# EAGLE board InkTime_v5_PCB (EAGLE 9.7.0)
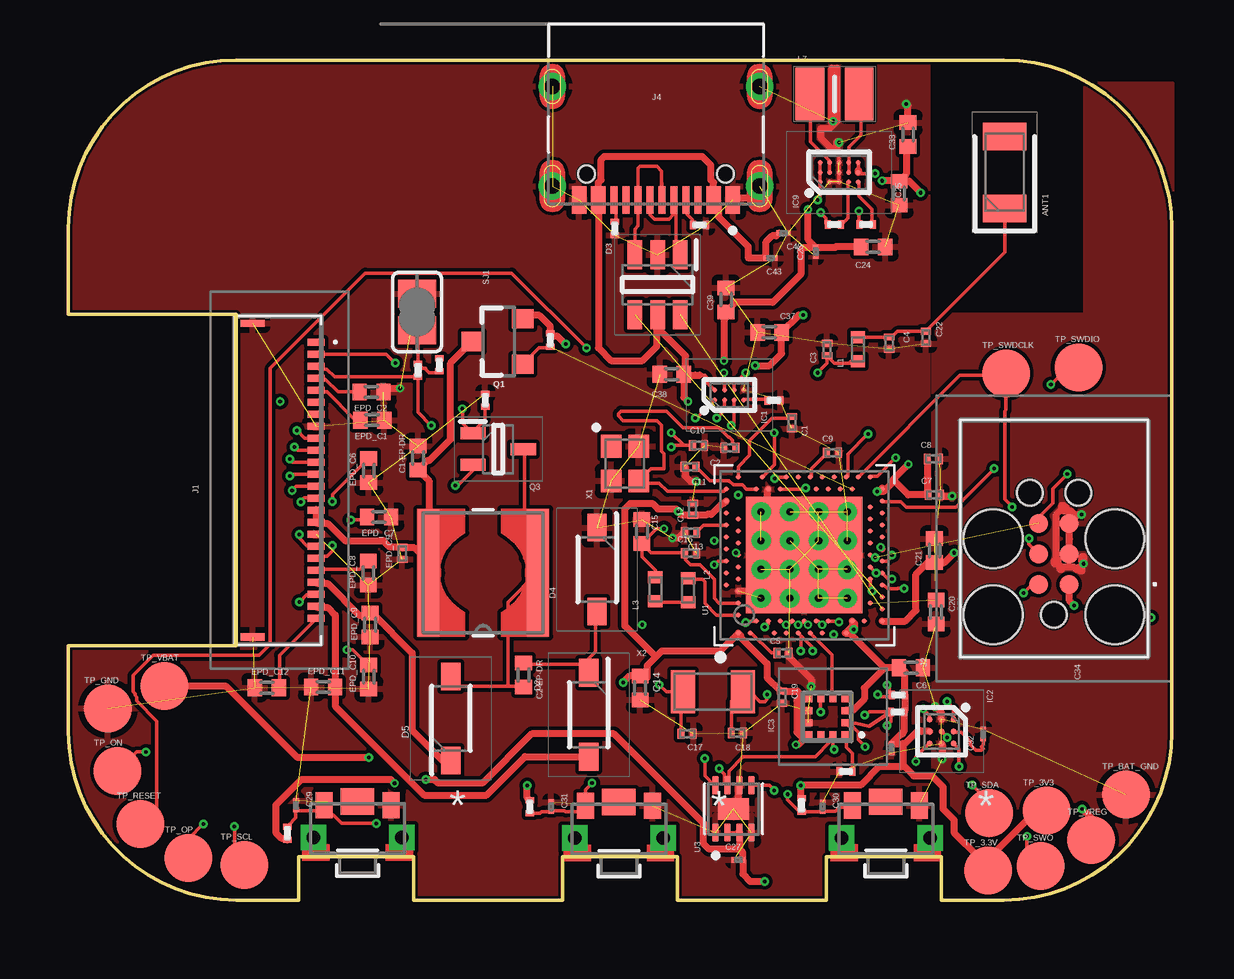
[diagram p0: board, top side]
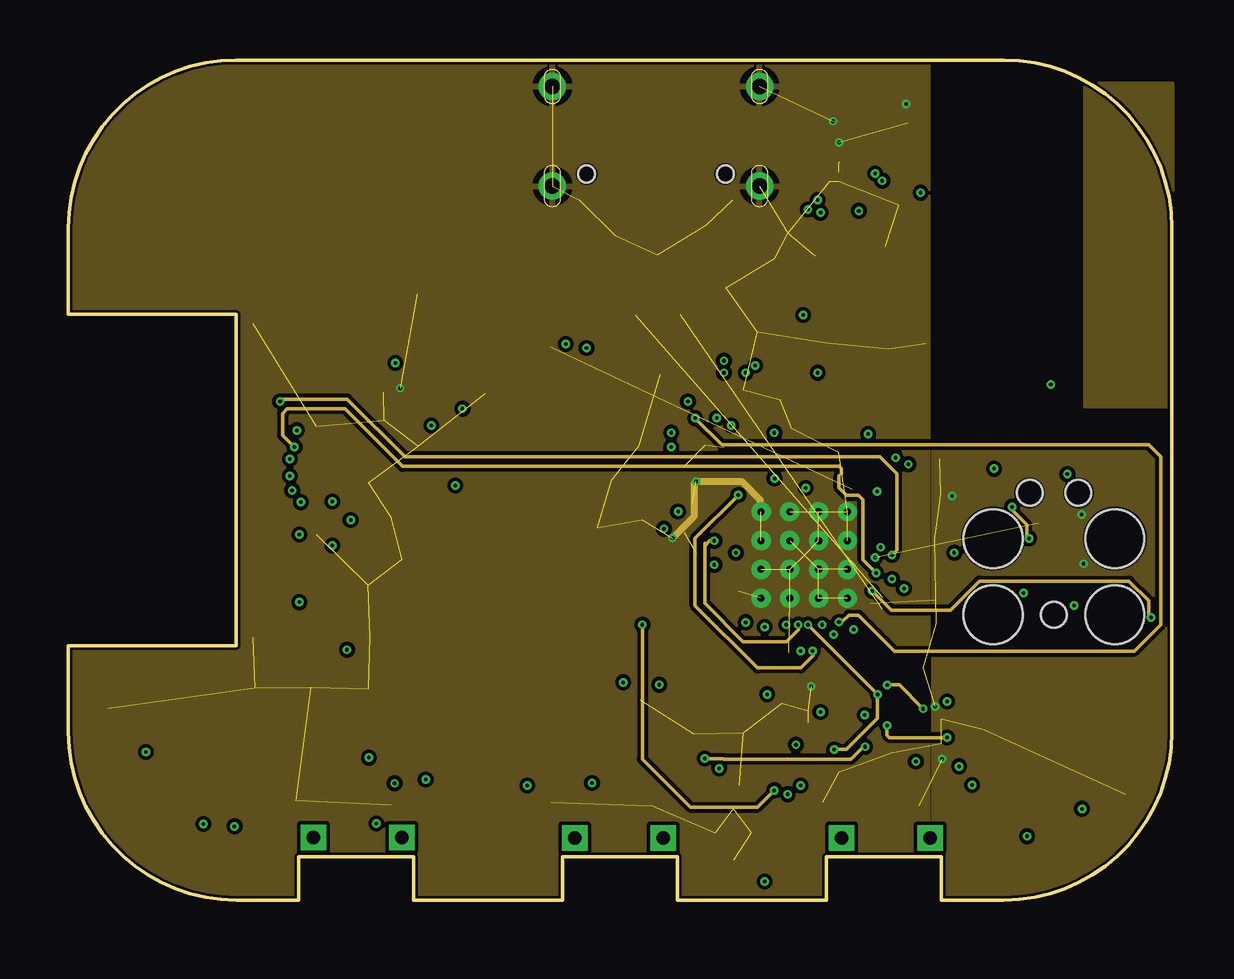
[diagram p1: board, inner layer Route2]
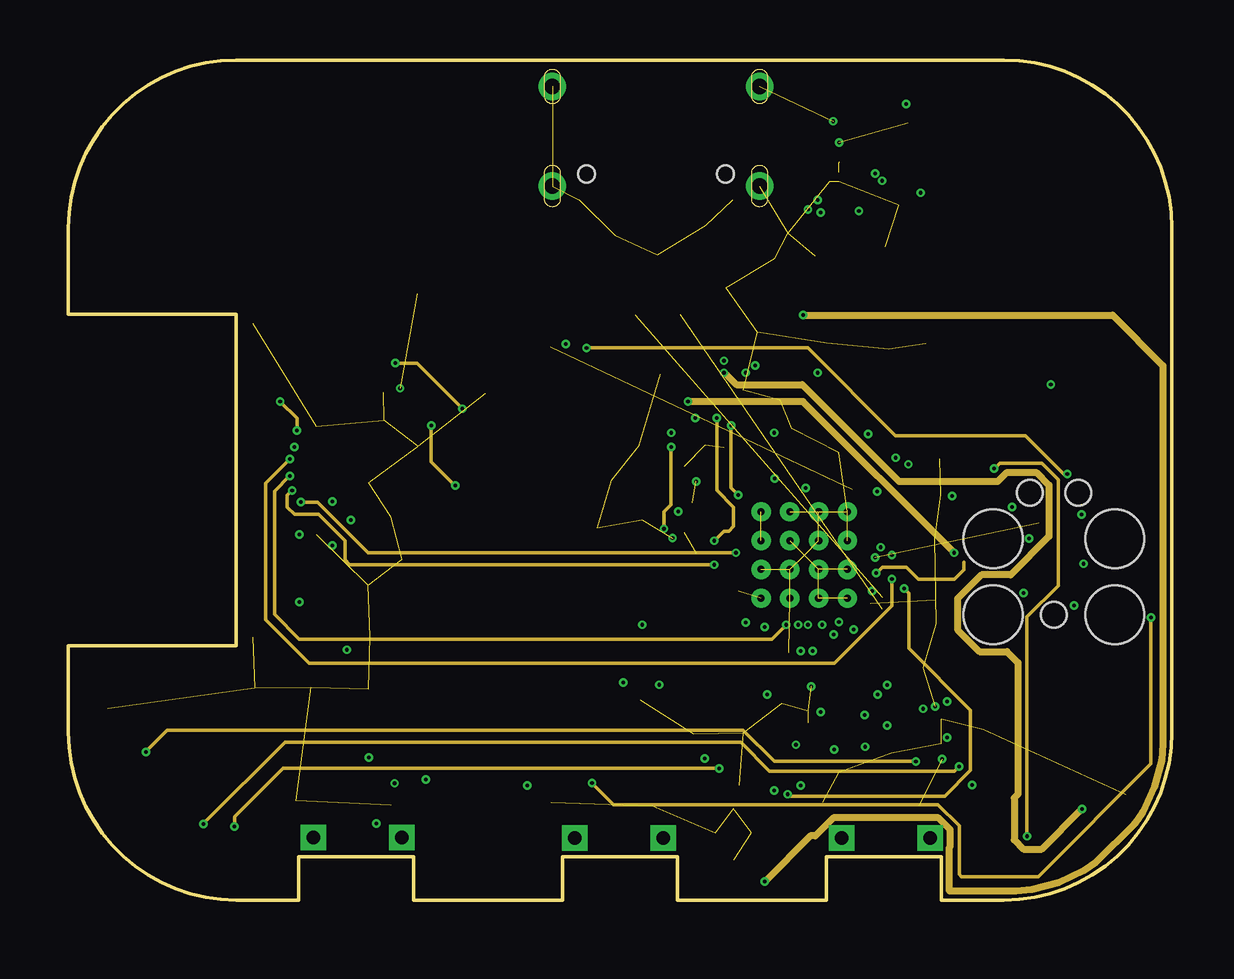
[diagram p2: board, inner layer Route15]
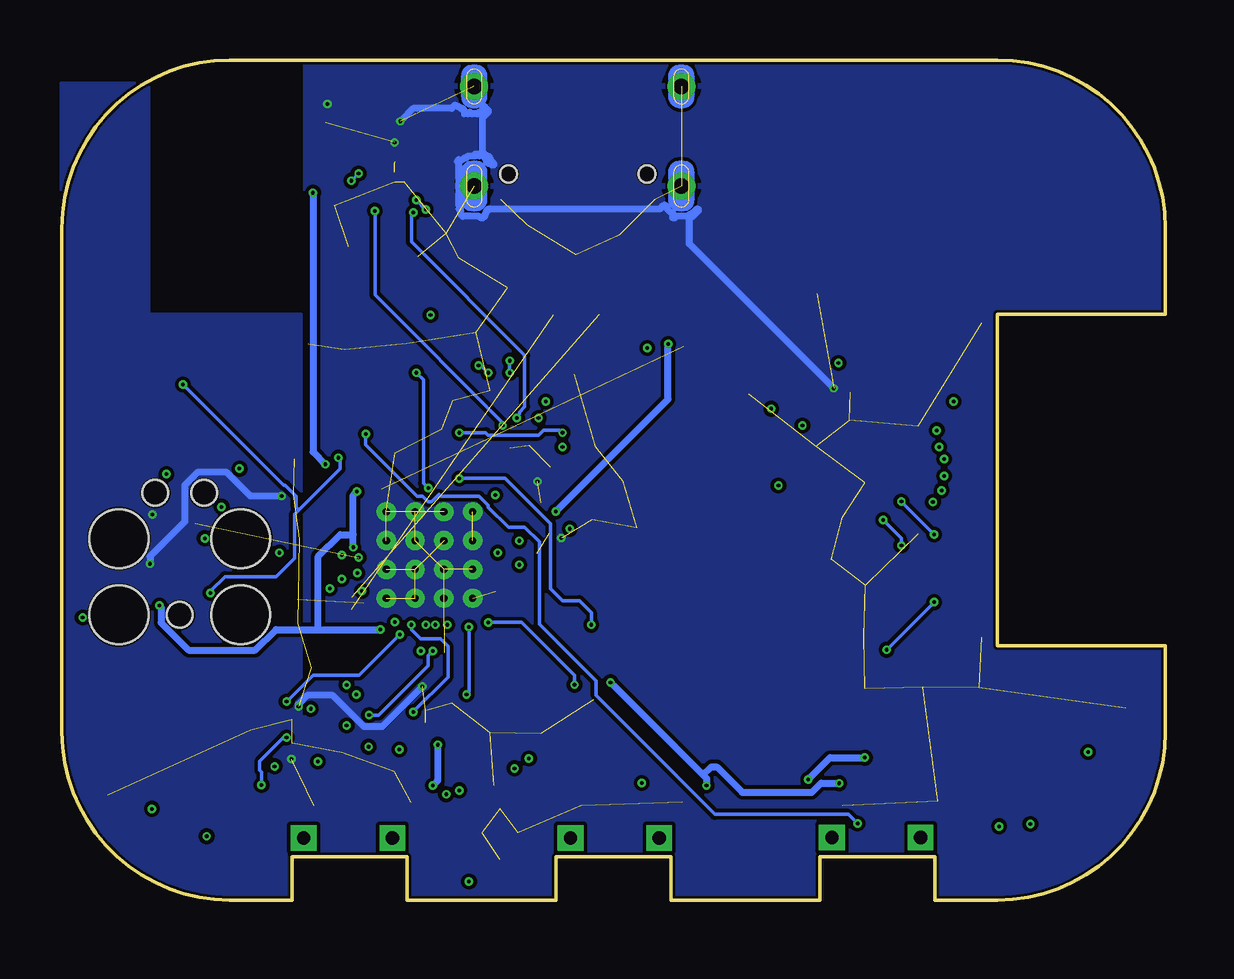
[diagram p3: board, bottom side, seen from below]

Size 46 x 35 mm. Coordinates in mm from the lower left corner, seen from the top.
Outline: 39,0 36.4,0 36.4,1.8 31.6,1.8 31.6,0 25.4,0 25.4,1.8 20.6,1.8 20.6,0 14.4,0 14.4,1.8 9.6,1.8 9.6,0 7,0 arc-90 0,7 0,10.6 7,10.6 7,24.4 0,24.4 0,28 arc-90 7,35 39,35 arc-90 46,28 46,7 arc-90 39,0
Copper layers (1+2*15+16): Top 0.035mm / dielectric 1.5mm / Route2 0.035mm / dielectric 0.15mm / Route15 0.035mm / dielectric 0.2mm / Bottom 0.035mm
Design rules "Fusion Electronics Design Rules *": minimum track width 6mil, minimum drill 0.15mm, track to track 6mil, track to pad 6mil, pad to pad 6mil, via to via 6mil, smd to smd 6mil, copper to edge 0.1mm, drill to drill 6mil, minimum pad ring 10mil, minimum via ring 0.1mm, stop-mask expansion 4mil, vias tented up to drill 9999mil, thermal gap 10mil
Net classes: 1 Power: width 0.3 mm

## Footprints (pad centres in the part's own frame; a part is rotated, then mirrored left to right if it is on the bottom)
2450AT18B100E_ANTC3216X140N = smd 1.15 x 1.8: 1 -1.5,0; 2 1.5,0
NORDIC_NRF_3_RESC0201_L = smd 0.28 x 0.43: 1 -0.255,0; 2 0.255,0
PERFECT_0402_0402 = smd 0.6 x 0.7: 1 -0.5,0; 2 0.5,0
GRM011R60J152KE01L_2_CAPC0201X13N = smd 0.22 x 0.23: 1 -0.185,0; 2 0.185,0
ESP32_C6_LIBRARY_5_SOD3716X135N = smd 1.15 x 0.8: 1 -1.75,0; 2 1.75,0
ESP32_C6_LIBRARY_3_SOT95P280X145-6N = smd 1.2 x 0.6: 1 -1.25,0.95; 2 -1.25,0; 3 -1.25,-0.95; 4 1.25,-0.95; 5 1.25,0; 6 1.25,0.95
BQ25180YBGR_BGA8C40P2X4_100X155X50 = smd 0.2 x 0.2: A1 -0.2,0.6; A2 0.2,0.6; B1 -0.2,0.2; B2 0.2,0.2; C1 -0.2,-0.2; C2 0.2,-0.2; D1 -0.2,-0.6; D2 0.2,-0.6
DRV2605YZFR_BGA9C50P3X3_144X144X62 = smd 0.25 x 0.25: A1 -0.5,0.5; A2 0,0.5; A3 0.5,0.5; B1 -0.5,0; B2 0,0; B3 0.5,0; C1 -0.5,-0.5; C2 0,-0.5; C3 0.5,-0.5
BMA423_BMA423 = smd 0.3 x 0.35: 1 -0.75,-0.775; 2 -0.25,-0.775; 3 0.25,-0.775; 4 0.75,-0.775; 7 0.75,0.775; 8 0.25,0.775; 9 -0.25,0.775; 10 -0.75,0.775 | smd 0.35 x 0.3: 5 0.775,-0.25; 6 0.775,0.25; 11 -0.775,0.25; 12 -0.775,-0.25
RT6160AWSC_BGA15C40P3X5_140X230X60 = smd 0.216 x 0.216: A1 -0.4,0.8; A2 0,0.8; A3 0.4,0.8; B1 -0.4,0.4; B2 0,0.4; B3 0.4,0.4; C1 -0.4,0; C2 0,0; C3 0.4,0; D1 -0.4,-0.4; D2 0,-0.4; D3 0.4,-0.4; E1 -0.4,-0.8; E2 0,-0.8; E3 0.4,-0.8
503480-2400_5034802400 = smd 0.3 x 0.7: 1 -5.75,1.525; 2 -5.25,1.525; 3 -4.75,1.525; 4 -4.25,1.525; 5 -3.75,1.525; 6 -3.25,1.525; 7 -2.75,1.525; 8 -2.25,1.525; 9 -1.75,1.525; 10 -1.25,1.525; 11 -0.75,1.525; 12 -0.25,1.525; 13 0.25,1.525; 14 0.75,1.525; 15 1.25,1.525; 16 1.75,1.525; 17 2.25,1.525; 18 2.75,1.525; 19 3.25,1.525; 20 3.75,1.525; 21 4.25,1.525; 22 4.75,1.525; 23 5.25,1.525; 24 5.75,1.525 | smd 0.3 x 1: MP1 -6.54,-1.125; MP2 6.54,-1.125
TC2030-IDC_TC2030IDC = smd 0.783 x 0.783: 1 -0.953,-0.635; 2 -0.953,0.635; 3 0.317,-0.635; 4 0.317,0.635; 5 1.588,-0.635; 6 1.588,0.635 | hole 2.451: -2.223,-2.54; -2.223,2.54; 0.952,-2.54; 0.952,2.54 | hole 1.067: -2.223,0; 2.857,-1.016; 2.857,1.016
KH-TYPE-C-16P_KINGHELM_KH-TYPE-C-16P = smd 0.6 x 1.15: A1_B12 -3.2,4.725; A4_B9 -2.4,4.725; A9_B4 2.4,4.725; A12_B1 3.2,4.725 | smd 0.3 x 1.15: A5 -1.25,4.725; A6 -0.25,4.725; A7 0.25,4.725; A8 1.25,4.725; B5 1.75,4.725; B6 0.75,4.725; B7 -0.75,4.725; B8 -1.75,4.725 | drill 0.65 pad 1.05: SH1 -4.32,0; SH2 4.32,0; SH3 -4.32,4.15; SH4 4.32,4.15 | hole 0.7: -2.89,3.65; 2.89,3.65
NORDIC_NRF_2_RESC0402_L = smd 0.5 x 0.6: 1 -0.5,0; 2 0.5,0
ESP32_C6_LIBRARY_2_IND_4828-WE-TPC_WRE = smd 0.9 x 5.3: 1 -2.286,0; 2 2.286,0
MLP2016SR47MT0S1_INDC2016X100N = smd 1.2 x 2.2: 1 -1.028,0; 2 1.028,0
ERA-1AEB3401C_0201 = smd 0.35 x 0.25: 1 0,0.275; 2 0,-0.275
ESP32_C6_LIBRARY_4_ESP32_C6_LIBRARY_4_ESP32_C6_LIBRARY_4_ESP32_C6_LIBRARY_4_ESP32_WROVER_SPARKFUN-DISCRETESEMI_SOT23-3 = smd 0.8 x 0.9: 1 -0.95,-1; 2 0.95,-1; 3 0,1.1
ESP32_C6_LIBRARY_6_SOT65P210X110-3N = smd 1.05 x 0.5: 1 -1.05,0.65; 2 -1.05,-0.65; 3 1.05,0
CPF0201D7K68C1_0201 = smd 0.35 x 0.25: 1 0,0.275; 2 0,-0.275
ESP32_C6_LIBRARY_7_JUMPER_SJ = smd 1.168 x 1.6: 1 -0.762,0; 2 0.762,0
2025-10-22_07-23-44_LIBRARY_SW_EVP-AKE31A_PAN = smd 0.711 x 1.092: 1 -1.4,-0.972; 2 1.4,-0.972 | drill 0.559 pad 0.914 square: 3 -1.848,0.381; 4 1.848,0.381 | smd 1.397 x 1.092: 5 0,-1.124
HECTOR_WATCH_1_TP20R = smd 2 x 2: TP 0,0
NORDIC_NRF_4_AQFN50P700X700X85_HS-74N = smd 4.85 x 4.85: P$74 0,0 | drill 0.3 pad 0.6: P$75 -1.8,1.8; P$76 -0.6,1.8; P$77 0.6,1.8; P$78 1.8,1.8; P$79 -1.8,0.6; P$80 -0.6,0.6; P$81 0.6,0.6; P$82 1.8,0.6; P$83 -1.8,-0.6; P$84 -0.6,-0.6; P$85 0.6,-0.6; P$86 1.8,-0.6; P$87 -1.8,-1.8; P$88 -0.6,-1.8; P$89 0.6,-1.8; P$90 1.8,-1.8 | smd 0.2 x 0.2: P$A8 -1.25,3.25; P$A10 -0.75,3.25; P$A12 -0.25,3.25; P$A14 0.25,3.25; P$A16 0.75,3.25; P$A18 1.25,3.25; P$A20 1.75,3.25; P$A22 2.25,3.25; P$A23 2.75,3.25; P$AA24 3.25,-2.25; P$AB2 -2.75,-2.5; P$AC5 -2,-2.75; P$AC9 -1,-2.75; P$AC11 -0.5,-2.75; P$AC13 0,-2.75; P$AC15 0.5,-2.75; P$AC17 1,-2.75; P$AC19 1.5,-2.75; P$AC21 2,-2.75; P$AC24 3.25,-2.75; P$AD2 -2.75,-3.25; P$AD4 -2.25,-3.25; P$AD6 -1.75,-3.25; P$AD8 -1.25,-3.25; P$AD10 -0.75,-3.25; P$AD12 -0.25,-3.25; P$AD14 0.25,-3.25; P$AD16 0.75,-3.25; P$AD18 1.25,-3.25; P$AD20 1.75,-3.25; P$AD22 2.25,-3.25; P$AD23 2.75,-3.25; P$B1 -3.25,2.75; P$B3 -2.5,2.75; P$B5 -2,2.75; P$B7 -1.5,2.75; P$B9 -1,2.75; P$B11 -0.5,2.75; P$B13 0,2.75; P$B15 0.5,2.75; P$B17 1,2.75; P$B19 1.5,2.75; P$B24 3.25,2.75; P$C1 -3.25,2.25; P$D2 -2.75,2; P$D23 2.75,2; P$E24 3.25,1.75; P$F2 -2.75,1.5; P$F23 2.75,1.5; P$G1 -3.25,1.25; P$H2 -2.75,1; P$H23 2.75,1; P$J1 -3.25,0.75; P$J24 3.25,0.75; P$K2 -2.75,0.5; P$L1 -3.25,0.25; P$L24 3.25,0.25; P$M2 -2.75,0; P$N1 -3.25,-0.25; P$N24 3.25,-0.25; P$P2 -2.75,-0.5; P$P23 2.75,-0.5; P$R1 -3.25,-0.75; P$R24 3.25,-0.75; P$T2 -2.75,-1; P$T23 2.75,-1; P$U1 -3.25,-1.25; P$U24 3.25,-1.25; P$V23 2.75,-1.5; P$W1 -3.25,-1.75; P$W24 3.25,-1.75; P$Y2 -2.75,-2; P$Y23 2.75,-2
ESP32_C6_LIBRARY_SON50P200X200X80-9N = smd 0.76 x 0.27: 1 -0.985,0.75; 2 -0.985,0.25; 3 -0.985,-0.25; 4 -0.985,-0.75; 5 0.985,-0.75; 6 0.985,-0.25; 7 0.985,0.25; 8 0.985,0.75 | smd 0.9 x 1.3: 9 0,0
NORDIC_NRF_BT-XTAL_2016_N = smd 0.95 x 0.85: 1 -0.725,-0.575; 2 0.725,-0.575; 3 0.725,0.575; 4 -0.725,0.575
NORDIC_NRF_1_XTAL_3215_N = smd 1 x 1.8: 1 -1.25,0; 2 1.25,0

## Placement (x,y rotation side)
ANT1  2450AT18B100E  [2450AT18B100E_ANTC3216X140N]  39.03,30.32 90 top
C1  12pF  [NORDIC_NRF_3_RESC0201_L]  30.16,19.89 270 top
C1-EP-DR  10uF  [PERFECT_0402_0402]  14.57,18.41 90 top
C2  12pF  [NORDIC_NRF_3_RESC0201_L]  27.57,18.84 180 top
C2-EP-DR  4.7uF/25V  [PERFECT_0402_0402]  18.98,9.38 270 top
C3  1pF  [NORDIC_NRF_3_RESC0201_L]  31.62,22.94 90 top
C4  1pF  [NORDIC_NRF_3_RESC0201_L]  34.21,23.2 270 top
C5  100nF  [NORDIC_NRF_3_RESC0201_L]  29.79,10.3 0 top
C6  4.7µF  [PERFECT_0402_0402]  35.12,9.68 0 top
C7  100nF  [NORDIC_NRF_3_RESC0201_L]  36.09,16.88 0 top
C8  100nF  [NORDIC_NRF_3_RESC0201_L]  36.05,18.38 0 top
C9  N.C.  [NORDIC_NRF_3_RESC0201_L]  31.86,18.63 0 top
C10  N.C.  [NORDIC_NRF_3_RESC0201_L]  26.27,18.94 0 top
C11  100pF  [NORDIC_NRF_3_RESC0201_L]  25.91,18.05 180 top
C12  100nF  [NORDIC_NRF_3_RESC0201_L]  26.02,16.29 90 top
C13  N.C.  [NORDIC_NRF_3_RESC0201_L]  25.93,15.31 180 top
C14  4.7µF  [PERFECT_0402_0402]  23.84,8.84 270 top
C15  1.0µF  [PERFECT_0402_0402]  23.91,15.35 90 top
C16  47nF  [NORDIC_NRF_3_RESC0201_L]  25.93,14.45 0 top
C17  12pF  [NORDIC_NRF_3_RESC0201_L]  25.8,6.93 180 top
C18  12pF  [NORDIC_NRF_3_RESC0201_L]  27.89,6.96 180 top
C19  100nF  [NORDIC_NRF_3_RESC0201_L]  29.75,8.45 270 top
C20  4.7µF  [PERFECT_0402_0402]  36.17,12 270 top
C21  4.7µF  [PERFECT_0402_0402]  36.1,14.55 90 top
C22  N.C.  [NORDIC_NRF_3_RESC0201_L]  35.75,23.44 270 top
C23  0.1uF  [GRM011R60J152KE01L_2_CAPC0201X13N]  31.15,27.01 90 top
C24  10uF  [PERFECT_0402_0402]  33.55,27.21 180 top
C25  22uF  [PERFECT_0402_0402]  34.63,29.45 270 top
C27  0.1uF  [GRM011R60J152KE01L_2_CAPC0201X13N]  27.93,1.67 0 top
C29  1uF  [GRM011R60J152KE01L_2_CAPC0201X13N]  9.49,3.95 270 top
C30  1uF  [GRM011R60J152KE01L_2_CAPC0201X13N]  31.44,3.89 270 top
C31  1uF  [GRM011R60J152KE01L_2_CAPC0201X13N]  20.13,3.89 270 top
C32  1uF  [GRM011R60J152KE01L_2_CAPC0201X13N]  38.14,6.91 270 top
C33  22uF  [PERFECT_0402_0402]  35,31.89 90 top
C34  0.1uF  [GRM011R60J152KE01L_2_CAPC0201X13N]  34.31,6.33 90 top
C37  1µF  [PERFECT_0402_0402]  29.23,23.65 180 top
C38  1µF  [PERFECT_0402_0402]  25.16,21.91 180 top
C39  10µF  [PERFECT_0402_0402]  27.41,25 90 top
C42  0.1uF  [GRM011R60J152KE01L_2_CAPC0201X13N]  29.8,27.78 180 top
C43  0.1uF  [GRM011R60J152KE01L_2_CAPC0201X13N]  29.27,26.75 180 top
D2  MBR0530  [ESP32_C6_LIBRARY_5_SOD3716X135N]  21.69,7.72 270 top
D3  USBLC6-2SC6Y  [ESP32_C6_LIBRARY_3_SOT95P280X145-6N]  24.56,25.64 270 top
D4  MBR0530  [ESP32_C6_LIBRARY_5_SOD3716X135N]  22.04,13.77 270 top
D5  MBR0530  [ESP32_C6_LIBRARY_5_SOD3716X135N]  15.95,7.56 90 top
EPD_C1  1uF/50V  [PERFECT_0402_0402]  12.66,19.99 180 top
EPD_C2  1uF/50V  [PERFECT_0402_0402]  12.64,21.16 180 top
EPD_C5  0.1uF/50V  [NORDIC_NRF_3_RESC0201_L]  13.92,14.44 90 top
EPD_C6  1uF/50V  [PERFECT_0402_0402]  12.52,17.89 90 top
EPD_C7  1uF/50V  [PERFECT_0402_0402]  12.95,15.95 180 top
EPD_C8  1uF/50V  [PERFECT_0402_0402]  12.5,13.62 90 top
EPD_C9  1uF/50V  [PERFECT_0402_0402]  12.57,11.46 90 top
EPD_C10  1uF/50V  [PERFECT_0402_0402]  12.52,9.3 90 top
EPD_C11  1uF/50V  [PERFECT_0402_0402]  10.62,8.88 0 top
EPD_C12  1uF/50V  [PERFECT_0402_0402]  8.27,8.85 0 top
IC1  BQ25180YBGR  [BQ25180YBGR_BGA8C40P2X4_100X155X50]  27.55,21.04 90 top
IC2  DRV2605YZFR  [DRV2605YZFR_BGA9C50P3X3_144X144X62]  36.4,7.03 270 top
IC3  BMA423  [BMA423_BMA423]  31.62,7.63 90 top
IC9  RT6160AWSC  [RT6160AWSC_BGA15C40P3X5_140X230X60]  32.13,30.32 90 top
J1  503480-2400  [503480-2400_5034802400]  8.8,17.49 270 top
J2  TC2030-IDC_TC2030-IDC  [TC2030-IDC_TC2030IDC]  41.08,14.1 90 top
J4  KH-TYPE-C-16P  [KH-TYPE-C-16P_KINGHELM_KH-TYPE-C-16P]  24.49,33.9 180 top
L1  3.9nH  [NORDIC_NRF_2_RESC0402_L]  32.91,22.95 90 top
L2  10µH  [NORDIC_NRF_2_RESC0402_L]  25.84,12.91 270 top
L3  15nH  [NORDIC_NRF_2_RESC0402_L]  24.47,12.95 90 top
L5  68uH  [ESP32_C6_LIBRARY_2_IND_4828-WE-TPC_WRE]  17.29,13.63 180 top
L7  FTC252012SR47MBCA  [MLP2016SR47MT0S1_INDC2016X100N]  31.94,33.58 0 top
P_PWR_EPD  10K  [ERA-1AEB3401C_0201]  20.09,23.33 180 top
Q1  20V/4.2A/52mΩ/1.4W  [ESP32_C6_LIBRARY_4_ESP32_C6_LIBRARY_4_ESP32_C6_LIBRARY_4_ESP32_C6_LIBRARY_4_ESP32_WROVER_SPARKFUN-DISCRETESEMI_SOT23-3]  17.94,23.27 90 top
Q3  SI1308EDL-T1-GE3  [ESP32_C6_LIBRARY_6_SOT65P210X110-3N]  17.91,18.79 0 top
R1_EP_DR  0.47  [CPF0201D7K68C1_0201]  14.57,22.08 0 top
R1_USB  5K1  [ERA-1AEB3401C_0201]  26.31,28.12 270 top
R2  0  [ERA-1AEB3401C_0201]  33.25,28.15 90 top
R2_EP_DR  10k  [CPF0201D7K68C1_0201]  17.38,20.83 0 top
R2_USB  5K1  [ERA-1AEB3401C_0201]  22.78,27.98 0 top
R3  0\  [CPF0201D7K68C1_0201]  32.41,5.35 90 top
R4  0  [CPF0201D7K68C1_0201]  31.93,28.14 90 top
R5  10K  [ERA-1AEB3401C_0201]  30.56,3.95 180 top
R7  10K  [ERA-1AEB3401C_0201]  9.13,2.78 0 top
R8  10K  [ERA-1AEB3401C_0201]  19.23,3.88 180 top
R9  10k  [CPF0201D7K68C1_0201]  29.41,20.82 270 top
R17  3K3  [ERA-1AEB3401C_0201]  34.61,8.54 270 top
R18  3K3  [ERA-1AEB3401C_0201]  34.57,7.84 270 top
R_TYPE_SEL  2.2  [CPF0201D7K68C1_0201]  15.46,22.3 0 top
SJ1  [ESP32_C6_LIBRARY_7_JUMPER_SJ]  14.53,24.5 270 top
SW_DN  2025-10-22_07-23-44_LIBRARY_EVP-AKE31ASW_EVP-AKE31A_PAN  [2025-10-22_07-23-44_LIBRARY_SW_EVP-AKE31A_PAN]  12.05,2.98 180 top
SW_ENT  2025-10-22_07-23-44_LIBRARY_EVP-AKE31ASW_EVP-AKE31A_PAN  [2025-10-22_07-23-44_LIBRARY_SW_EVP-AKE31A_PAN]  22.95,2.96 180 top
SW_UP  2025-10-22_07-23-44_LIBRARY_EVP-AKE31ASW_EVP-AKE31A_PAN  [2025-10-22_07-23-44_LIBRARY_SW_EVP-AKE31A_PAN]  34.08,2.96 180 top
TP_3.3V  HECTOR_WATCH_1_TPTP20R  [HECTOR_WATCH_1_TP20R]  38.33,1.22 0 top
TP_3V3  HECTOR_WATCH_1_TPTP20R  [HECTOR_WATCH_1_TP20R]  40.78,3.72 0 top
TP_BAT_GND  HECTOR_WATCH_1_TPTP20R  [HECTOR_WATCH_1_TP20R]  44.08,4.39 0 top
TP_GND  HECTOR_WATCH_1_TPTP20R  [HECTOR_WATCH_1_TP20R]  1.65,7.98 0 top
TP_ON  HECTOR_WATCH_1_TPTP20R  [HECTOR_WATCH_1_TP20R]  2.05,5.38 0 top
TP_OP  HECTOR_WATCH_1_TPTP20R  [HECTOR_WATCH_1_TP20R]  5.01,1.75 0 top
TP_RESET  HECTOR_WATCH_1_TPTP20R  [HECTOR_WATCH_1_TP20R]  3,3.17 0 top
TP_SCL  HECTOR_WATCH_1_TPTP20R  [HECTOR_WATCH_1_TP20R]  7.33,1.46 0 top
TP_SDA  HECTOR_WATCH_1_TPTP20R  [HECTOR_WATCH_1_TP20R]  38.38,3.62 0 top
TP_SWDCLK  HECTOR_WATCH_1_TPTP20R  [HECTOR_WATCH_1_TP20R]  39.08,21.94 0 top
TP_SWDIO  HECTOR_WATCH_1_TPTP20R  [HECTOR_WATCH_1_TP20R]  42.11,22.19 0 top
TP_SWO  HECTOR_WATCH_1_TPTP20R  [HECTOR_WATCH_1_TP20R]  40.53,1.42 0 top
TP_VBAT  HECTOR_WATCH_1_TPTP20R  [HECTOR_WATCH_1_TP20R]  4,8.92 0 top
TP_VREG  HECTOR_WATCH_1_TPTP20R  [HECTOR_WATCH_1_TP20R]  42.64,2.5 0 top
U1  NORDIC_NRF_4_NRF52840_QF  [NORDIC_NRF_4_AQFN50P700X700X85_HS-74N]  30.67,14.38 90 top
U3  MAX17048G+T10  [ESP32_C6_LIBRARY_SON50P200X200X80-9N]  27.73,3.8 90 top
X1  32MHz  [NORDIC_NRF_BT-XTAL_2016_N]  23.2,18.19 270 top
X2  32.768kHz  [NORDIC_NRF_1_XTAL_3215_N]  26.88,8.67 0 top

## Library data of the parts
ANT1 = InkTime_v5; ARROW_PART_NUMBER: 2450AT18B100E; ARROW_PRICE-STOCK: https://www.arrow.com/en/products/2450at18b100e/johanson-dielectrics?utm_currency=USD&region=nac; DESCRIPTION: Antennas 2.45GHz ANTENNA; HEIGHT: 1.4mm; MANUFACTURER_NAME: JOHANSON TECHNOLOGY; MANUFACTURER_PART_NUMBER: 2450AT18B100E; MOUSER_PART_NUMBER: 609-2450AT18B100E; MOUSER_PRICE-STOCK: https://www.mouser.co.uk/ProductDetail/Johanson-Technology/2450AT18B100E?qs=yCnrNFeXz%252Bh5MFsFIXGZGA%3D%3D
C1 C1-EP-DR C2 C2-EP-DR C3-C22 C24 C25 C33 C37-C39 EPD_C1 EPD_C2 EPD_C5-EPD_C12 L1-L3 P_PWR_EPD R1_EP_DR R1_USB R2 R2_EP_DR R2_USB R3-R5 R7-R9 R17 R18 R_TYPE_SEL SJ1 TP_3.3V TP_3V3 TP_BAT_GND TP_GND TP_ON TP_OP TP_RESET TP_SCL TP_SDA TP_SWDCLK TP_SWDIO TP_SWO TP_VBAT TP_VREG U1 X1 X2 = InkTime_v5
C23 C27 C29-C32 C34 C42 C43 = InkTime_v5; AVAILABILITY: In Stock; CHECK_PRICES: https://www.snapeda.com/parts/GRM011R60J152KE01L/Murata/view-part/?ref=eda; DESCRIPTION: SMD Capacitor X5R(EIA) with Capacitance: 1500pF Tol. 10%. Rated Voltage: 6.3Vdc; MF: Murata; MP: GRM011R60J152KE01L; PACKAGE: 0201 Murata; PRICE: None; SNAPEDA_LINK: https://www.snapeda.com/parts/GRM011R60J152KE01L/Murata/view-part/?ref=snap
D2 D4 D5 = InkTime_v5; AVAILABILITY: In Stock; CHECK_PRICES: https://www.snapeda.com/parts/MBR0530/Onsemi/view-part/?ref=eda; DESCRIPTION: Diode Schottky 30 V 500mA Surface Mount SOD-123; MF: ON Semiconductor; MP: MBR0530; PACKAGE: SOD-123-2 ON Semiconductor; PRICE: None; PURCHASE-URL: https://www.snapeda.com/api/url_track_click_mouser/?unipart_id=179458&manufacturer=ON Semiconductor&part_name=MBR0530&search_term=None; SNAPEDA_LINK: https://www.snapeda.com/parts/MBR0530/Onsemi/view-part/?ref=snap
D3 = InkTime_v5; AVAILABILITY: In Stock; CHECK_PRICES: https://www.snapeda.com/parts/USBLC6-2SC6Y/STMicroelectronics/view-part/?ref=eda; DESCRIPTION: 17V Clamp 5A (8/20µs) Ipp Tvs Diode Surface Mount SOT-23-6; MF: STMicroelectronics; MP: USBLC6-2SC6Y; PACKAGE: SOT-23-6 STMicroelectronics; PRICE: None; SNAPEDA_LINK: https://www.snapeda.com/parts/USBLC6-2SC6Y/STMicroelectronics/view-part/?ref=snap
IC1 = InkTime_v5; ARROW_PART_NUMBER: BQ25180YBGR; ARROW_PRICE-STOCK: https://www.arrow.com/en/products/bq25180ybgr/texas-instruments?utm_currency=USD&region=nac; DESCRIPTION: Charger IC Lithium Ion/Polymer, Lithium Iron Phosphate 8-DSBGA (1.6x1.1); HEIGHT: 0.5mm; MANUFACTURER_NAME: Texas Instruments; MANUFACTURER_PART_NUMBER: BQ25180YBGR; MOUSER_PART_NUMBER: 595-BQ25180YBGR; MOUSER_PRICE-STOCK: https://www.mouser.co.uk/ProductDetail/Texas-Instruments/BQ25180YBGR?qs=doiCPypUmgEWjAK%252BJAX6Tw%3D%3D
IC2 = InkTime_v5; ARROW_PART_NUMBER: DRV2605YZFR; ARROW_PRICE-STOCK: https://www.arrow.com/en/products/drv2605yzfr/texas-instruments?region=nac; DESCRIPTION: Haptic Driver for ERM/LRA with Built-In Library and Smart Loop Architecture; HEIGHT: 0.625mm; MANUFACTURER_NAME: Texas Instruments; MANUFACTURER_PART_NUMBER: DRV2605YZFR
IC3 = InkTime_v5; ARROW_PART_NUMBER: BMA423; ARROW_PRICE-STOCK: https://www.arrow.com/en/products/bma423/bosch; DESCRIPTION: Accelerometers Triaxial low-g 12bit Acceleration Sensor; HEIGHT: 1mm; MANUFACTURER_NAME: BOSCH; MANUFACTURER_PART_NUMBER: BMA423; MOUSER_PART_NUMBER: 262-BMA423; MOUSER_PRICE-STOCK: https://www.mouser.co.uk/ProductDetail/Bosch-Sensortec/BMA423?qs=HXFqYaX1Q2xC%252BSgeGoX3mg%3D%3D
IC9 = InkTime_v5; DESCRIPTION: Buck-Boost Regulator Positive Output Step-Up/Step-Down I2C DC-DC Controller IC 15-WL-CSP (BSC) (1.4x2.3); HEIGHT: 0.6mm; MANUFACTURER_NAME: RICHTEK; MANUFACTURER_PART_NUMBER: RT6160AWSC; MOUSER_PART_NUMBER: 835-RT6160AWSC; MOUSER_PRICE-STOCK: https://www.mouser.co.uk/ProductDetail/Richtek/RT6160AWSC?qs=amGC7iS6iy%2FLd9PSoixZXQ%3D%3D
J1 = InkTime_v5; DESCRIPTION: FFC & FPC Connectors 0.5mm FPC RA SMT Dual Contact 24Ckt; HEIGHT: 1.87mm; MANUFACTURER_NAME: Molex; MANUFACTURER_PART_NUMBER: 503480-2400; MOUSER_PART_NUMBER: 538-503480-2400; MOUSER_PRICE-STOCK: https://www.mouser.co.uk/ProductDetail/Molex/503480-2400?qs=OAhjpuo3Vu7efIoxFh9AOw%3D%3D
J2 = InkTime_v5; DESCRIPTION: CABLE ADAPTER 6 POS; HEIGHT: 19mm; MANUFACTURER_NAME: Tag Connect; MANUFACTURER_PART_NUMBER: TC2030-IDC
J4 = InkTime_v5; AVAILABILITY: Not in stock; CHECK_PRICES: https://www.snapeda.com/parts/KH-TYPE-C-16P/Kinghelm/view-part/?ref=eda; MF: kinghelm; MP: KH-TYPE-C-16P; PACKAGE: None; PRICE: None; SNAPEDA_LINK: https://www.snapeda.com/parts/KH-TYPE-C-16P/Kinghelm/view-part/?ref=snap
L5 = InkTime_v5; COPYRIGHT: Copyright (C) 2024 Ultra Librarian. All rights reserved.; MANUFACTURER_PART_NUMBER: 744043680; MFR_NAME: Wurth Electronics
L7 = InkTime_v5; DESCRIPTION: SMD / SMT Inductors (Coils), L=0.47?H, L x W x T :; HEIGHT: 1mm; JLCPCB: https://jlcpcb.com/partdetail/6763488-FTC252012SR47MBCA/C5832368; MANUFACTURER_NAME: TDK; MANUFACTURER_PART_NUMBER: FTC252012SR47MBCA
Q1 = InkTime_v5; PROD_ID: TRAN-14388
Q3 = InkTime_v5; AVAILABILITY: In Stock; CHECK_PRICES: https://www.snapeda.com/parts/SI1308EDL-T1-GE3/Vishay+Siliconix/view-part/?ref=eda; DESCRIPTION: Si1308EDL-T1-GE3 N-channel MOSFET Transistor, 1.5 A, 30 V, 3-Pin SC-70 | Siliconix / Vishay SI1308EDL-T1-GE3; MF: Vishay Siliconix; MP: SI1308EDL-T1-GE3; PACKAGE: SOT-323 Vishay Semiconductor; PRICE: None; PURCHASE-URL: https://www.snapeda.com/api/url_track_click_mouser/?unipart_id=274603&manufacturer=Vishay Siliconix&part_name=SI1308EDL-T1-GE3&search_term=None; SNAPEDA_LINK: https://www.snapeda.com/parts/SI1308EDL-T1-GE3/Vishay+Siliconix/view-part/?ref=snap
SW_DN SW_ENT SW_UP = InkTime_v5; COPYRIGHT: Copyright (C) 2025 Ultra Librarian. All rights reserved.; DIGI-KEY_PART_NUMBER_1: P123437TR-ND; DIGI-KEY_PART_NUMBER_2: P123437CT-ND; DIGI-KEY_PART_NUMBER_3: P123437DKR-ND; MANUFACTURER_NAME: Panasonic; MANUFACTURER_PART_NUMBER: EVP-AKE31A
U3 = InkTime_v5; AVAILABILITY: In Stock; CHECK_PRICES: https://www.snapeda.com/parts/MAX17048G+T10/Analog+Devices/view-part/?ref=eda; DESCRIPTION: 3µA 1-Cell/2-Cell Fuel Gauge with ModelGauge; MF: Analog Devices; MP: MAX17048G+T10; PACKAGE: TDFN-8 Maxim; PRICE: None; PURCHASE-URL: https://www.snapeda.com/api/url_track_click_mouser/?unipart_id=329239&manufacturer=Analog Devices&part_name=MAX17048G+T10&search_term=None; SNAPEDA_LINK: https://www.snapeda.com/parts/MAX17048G+T10/Analog+Devices/view-part/?ref=snap

## Nets
3V3 [Power]: C6.1 C7.1 C8.1 C12.1 C14.1 C19.1 C25.1 C33.1 C34.2 IC2.C2 IC3.3 IC3.7 IC3.10 IC9.E2 IC9.E3 J2.1 P_PWR_EPD.2 Q1.2 R5.2 R7.2 R8.2 R17.1 R18.1 TP_3.3V.TP TP_3V3.TP U1.P$A22 U1.P$AD14 U1.P$AD23 U1.P$B1 U1.P$W1 U1.P$Y2
ALERT: U1.P$J24 U3.5
D+: D3.4 U1.P$AD6
D-: D3.6 U1.P$AD4
DEC1: C5.1 U1.P$C1
DEC3: C11.1 U1.P$D23
DEC4_6: C10.1 C15.1 C16.1 L3.2 U1.P$B5 U1.P$E24
DN: D3.1 J4.A7 J4.B7
DP: D3.3 J4.A6 J4.B6
EPD_3V3 [Power]: C1-EP-DR.1 EPD_C5.2 J1.15 J1.16 L5.2 Q1.3
EPD_BUSY: J1.9 U1.P$AD12
EPD_CS: J1.12 U1.P$K2
EPD_DC: J1.11 U1.P$AD10
EPD_RST: J1.10 U1.P$AC11
GDR: J1.2 Q3.1 R2_EP_DR.2
GND [Power]: C1-EP-DR.2 C1.2 C2.2 C3.2 C4.2 C5.2 C6.2 C7.2 C8.2 C9.2 C10.2 C11.2 C12.2 C13.2 C14.2 C15.2 C16.2 C17.1 C18.1 C19.2 C20.2 C21.2 C22.2 C23.1 C24.1 C25.2 C27.1 C29.1 C30.1 C31.1 C32.1 C33.2 C34.1 C37.2 C38.2 C39.2 C42.1 C43.1 D3.2 D4.1 EPD_C1.1 EPD_C2.1 EPD_C5.1 EPD_C6.1 EPD_C7.1 EPD_C8.1 EPD_C9.1 EPD_C10.1 EPD_C11.1 EPD_C12.1 IC1.D2 IC2.B1 IC2.B3 IC3.8 IC3.9 IC9.B1 IC9.C1 IC9.C2 IC9.C3 J1.8 J1.17 J1.MP1 J1.MP2 J2.3 J2.5 J4.A1_B12 J4.A12_B1 J4.SH1 J4.SH2 J4.SH3 J4.SH4 R1_USB.1 R2_EP_DR.1 R2_USB.2 R3.1 R9.1 SJ1.1 SW_DN.1 SW_ENT.1 SW_UP.1 TP_BAT_GND.TP TP_GND.TP U1.P$74 U1.P$75 U1.P$76 U1.P$77 U1.P$78 U1.P$79 U1.P$80 U1.P$81 U1.P$82 U1.P$83 U1.P$84 U1.P$85 U1.P$86 U1.P$87 U1.P$88 U1.P$89 U1.P$90 U1.P$B7 U1.P$F23 U3.1 U3.4 U3.6 U3.9 X1.2 X1.4
HAPTIC_EN: IC2.A1 U1.P$U1
IMU_INT1: IC3.5 U1.P$N1
IMU_INT2: IC3.6 U1.P$P2
LX1: IC9.B2 IC9.B3 L7.1
LX2: IC9.D2 IC9.D3 L7.2
MOSI: J1.14 U1.P$B13
N$1: IC1.D1 R9.2
N$2: IC9.D1 R4.2
N$3: IC9.E1 R2.2
N$4: IC3.1 R3.2
N$5: C20.1 U1.P$AC5
N$6: L2.1 U1.P$B3
N$7: L2.2 L3.1
N$8: C2.1 U1.P$A23 X1.3
N$9: C13.1 U1.P$A18
N$10: C1.1 U1.P$B24
N$11: X1.1
N$12: ANT1.1 C4.1 C22.1 L1.2
N$13: C3.1 L1.1 U1.P$H23
N$14: C9.1 U1.P$N24
N$15: C32.2 IC2.A2
N$16: C2-EP-DR.2 D5.2 L5.1 Q3.3
N$17: C2-EP-DR.1 D2.1 D4.2
N$18: R1_EP_DR.1 R_TYPE_SEL.2 SJ1.2
N$19: R_TYPE_SEL.1
N$20: EPD_C2.2 J1.4
N$21: EPD_C1.2 J1.5
N$22: EPD_C6.2 J1.18
N$23: EPD_C7.2 J1.19
N$24: EPD_C8.2 J1.20
N$25: J4.A5 R1_USB.2
N$26: EPD_C10.2 J1.22
N$27: J4.B5 R2_USB.1
N$28: EPD_C12.2 J1.24
OUT+: IC2.A3 TP_OP.TP
OUT-: IC2.C3 TP_ON.TP
P0.00/XL1: C17.2 U1.P$D2 X2.1
P0.01/XL2: C18.2 U1.P$F2 X2.2
P0.04: U1.P$J1
P0.09: U1.P$L24
P0.13: C30.2 R5.1 SW_UP.2 U1.P$AD8
P0.14: C31.2 R8.1 SW_ENT.2 U1.P$AC9
P0.19: U1.P$AC15
P0.20: U1.P$AD16
P0.21: U1.P$AC17
P0.22: U1.P$AD18
P0.23: U1.P$AC19
P0.24: U1.P$AD20
P0.25: U1.P$AC21
P0.26: U1.P$G1
P0.27: U1.P$H2
P0.28: U1.P$B11
P0.29: U1.P$A10
P0.30: U1.P$B9
P0.31: U1.P$A8
P1.01: P_PWR_EPD.1 Q1.1 U1.P$Y23
P1.02: C29.2 R7.1 SW_DN.2 U1.P$W24
P1.03: U1.P$V23
P1.04: U1.P$U24
P1.05: U1.P$T23
P1.06: U1.P$R24
P1.07: U1.P$P23
P1.09: U1.P$R1
P1.10: U1.P$A20
P1.11: U1.P$B19
P1.12: U1.P$B17
P1.13: U1.P$A16
P1.14: U1.P$B15
P1.15: U1.P$A14
PMIC_INT: IC1.A1 U1.P$T2
PREVGH [Power]: D5.1 EPD_C9.2 J1.21
PREVGL [Power]: D2.2 EPD_C11.2 J1.23
RESE: J1.3 Q3.2 R1_EP_DR.2
RESET: J2.6 TP_RESET.TP U1.P$AC13
SCK: J1.13 U1.P$A12
SCL: IC1.B1 IC2.C1 IC3.12 R4.1 R17.2 TP_SCL.TP U1.P$M2 U3.7
SDA: IC1.C1 IC2.B2 IC3.2 R2.1 R18.2 TP_SDA.TP U1.P$L1 U3.8
SWDCLK: J2.4 TP_SWDCLK.TP U1.P$AA24
SWDIO: J2.2 TP_SWDIO.TP U1.P$AC24
SWO: TP_SWO.TP U1.P$AD22
VBAT [Power]: C27.2 C37.1 IC1.C2 TP_VBAT.TP U3.2 U3.3
VBUS [Power]: C21.1 C38.1 C42.2 C43.2 D3.5 IC1.A2 J4.A4_B9 J4.A9_B4 U1.P$AD2
VREG [Power]: C23.2 C24.2 C39.1 IC1.B2 IC9.A1 IC9.A2 IC9.A3 TP_VREG.TP

## Tracks (layer width: path | path; a pad name or v marks a point on that pad's centre or on a via)
3V3  (via drill 0.15)
  Top 0.152: 32.93,30.37 32.93,30.39 IC9.E3 | IC9.E2 32.98,30.27 v33.63,30.27
  Top 0.3: C25.1 34.61,29.97 v33.93,29.97 | 35.03,31.36 C33.1 35.01,31.23 34.93,31.23 | 34.93,31.37 34.93,31.23 | 34.93,31.23 34.93,30.25 C25.1 | C25.1 35.05,29.95 v35.53,29.47 | 34.43,17.47 34.03,17.07 | 34.03,17.07 33.93,17.07 U1.P$AD23 | U1.P$AD23 33.93,17.17 | 34.02,9.68 C6.1 34.7,9.66 34.72,9.68 | 34.02,9.68 32.58,11.12 U1.P$W1 32.39,11.12 32.67,11.41 U1.P$Y2 32.77,11.53 32.77,11.31 v32.73,11.27 | 34.72,9.68 34.88,9.52 R17.1 34.88,7.92 34.83,7.87 R18.1 34.84,7.07 34.83,7.06 | 34.72,9.68 34.63,9.77 34.58,9.72 | 34.75,6.95 34.83,7.03 34.83,7.06 | 34.75,6.95 C34.2 34.78,6.52 | 34.83,7.06 34.83,7.07 | 34.78,6.52 34.88,6.52 35.43,7.07 35.53,7.07 35.57,7.03 IC2.C2 | 24.49,10.13 24.73,10.37 27.17,10.37 U1.P$B1 28.02,11.03 28.02,10.96 29.13,9.85 29.13,9.27 29.69,8.7 C19.1 30.39,8.7 30.58,8.52 | 24.49,10.13 24.13,9.77 24.13,9.36 | 24.13,9.36 24.13,9.27 | v23.13,9.07 23.4,9.34 C14.1 23.96,9.36 24.13,9.36 | R8.2 19.13,4.25 v19.13,4.77 | 30.58,8.52 30.72,8.38 IC3.7 | IC3.10 30.66,6.7 | 30.66,6.7 30.44,6.47 v30.33,6.47 | R5.2 30.53,4.26 v30.53,4.77 30.67,4.79 33.03,4.79 33.79,5.55 34.7,5.55 34.78,5.63 | v41.93,12.27 41.73,12.47 41.73,13.07 41.72,13.17 J2.1 | U1.P$A22 27.33,16.53 27.26,16.53 26.8,16.07 26.63,16.07 26.59,16.03 C12.1 25.56,16.03 v25.41,16.19 25.33,16.3 24.57,16.3 24.34,16.52 23.43,16.52 23.2,16.3 23.2,11.42 24.49,10.13 | U1.P$AD14 v33.85,14.7 | v33.85,14.7 | U1.P$AD23 | C8.1 35.8,17.6 35.83,17.57 35.83,16.89 C7.1 35.02,16.88 34.43,17.47 | 34.43,17.47 34.38,17.52 v35.02,18.16 | v33.71,17.02 33.75,17.02 33.76,17.03 33.99,17.03 34.03,17.07 | Q1.2 19.08,24.36 19.64,24.36 20.09,23.91 P_PWR_EPD.2 20.22,23.48 20.39,23.48 20.71,23.17 v20.73,23.17
  Top 0.3: 30.66,6.7 30.36,7 30.36,8.29 30.58,8.52 | v13.6,4.86 13.45,5.02 9.71,5.02 8.64,3.95 8.64,2.81 8.87,2.58 9.1,2.58 R7.2 | TP_3V3.TP 40.72,3.64 40.27,3.64 38.36,1.74 38.36,1.28 TP_3.3V.TP 38.29,1.82 37.91,1.82 36.91,2.81 36.91,3.34 36.46,3.8 36.46,4.71 36,5.17 35.24,5.17 34.78,5.63 | 32.93,30.39 32.95,30.39 IC9.E2 | IC3.3 32.42,7.91 32.72,7.91 33.18,8.37 33.18,8.83 33.94,9.59 34.02,9.68 | 34.75,6.95 34.78,6.92 34.83,7.06 | 34.78,6.52 34.78,5.63
  Bottom 0.152: v33.63,30.27 v33.93,29.97
  Bottom 0.3: v35.53,29.47 35.53,18.67 v35.02,18.16 | v23.13,9.07 19.27,5.21 | 19.27,5.21 19.13,5.07 v19.13,4.77 | v30.33,6.47 30.33,4.97 v30.53,4.77 | v41.93,12.27 41.87,12.21 41.87,11.56 40.72,10.41 37.93,10.41 37.07,11.27 35.31,11.27 | v20.73,23.17 20.73,20.87 v25.41,16.19 | v33.71,17.02 33.85,16.87 33.85,15.23 | v33.85,14.7 33.85,15.23 | 35.31,11.27 v32.73,11.27 | v13.6,4.86 14.36,4.86 14.74,4.48 17.64,4.48 18.7,5.55 18.93,5.55 19.27,5.21 | 33.85,15.23 34.4,15.23 35.31,14.31 35.31,11.27
ALERT  (via drill 0.15)
  Top 0.152: U3.5 29.22,4.78 v29.43,4.57 | U1.P$J24 29.5,17.62 v29.44,17.56
  Route2 0.152: v23.93,11.47 23.93,5.87 25.93,3.87 28.73,3.87 v29.43,4.57
  Bottom 0.152: v23.93,11.47 23.93,11.97 24.43,12.47 25.13,12.47 25.63,12.97 25.63,15.67 27.52,17.56 v29.44,17.56
D+  (1 unrouted)
D-  (1 unrouted)
DEC1
  Top 0.152: C5.1 29.3,10.3 28.48,11.12 U1.P$C1
DEC3
  Top 0.152: U1.P$D23 28.27,17.12 28.1,17.3 27.72,17.3 27.56,17.45 27.55,17.45 27.53,17.47 26.74,17.47 C11.1
DEC4_6  (via drill 0.15)
  Top 0.152: U1.P$B5 27.12,12.38 26.93,12.57 26.93,13.37 26.33,13.97 25.93,13.97 25.73,14.17 25.73,14.47 | 25.73,14.47 | L3.2 24.47,13.73 23.91,14.3 C15.1 | C15.1 24.28,14.47 25.63,14.47 25.64,14.47 C16.1 25.71,14.47 25.73,14.47 | U1.P$E24 29.43,18.13 v29.43,19.47 | v25.13,19.47 25.66,18.94 C10.1 25.2,18.94 v25.13,18.87 | C15.1 24.52,15.47 v24.83,15.47
  Route15 0.152: v25.13,18.87 25.13,16.47 24.83,16.17 v24.83,15.47
  Bottom 0.152: v29.43,19.47 28.33,19.47 28.23,19.37 26.13,19.37 25.93,19.57 25.23,19.57 v25.13,19.47
DN
  Top 0.152: J4.A7 24.24,28.55 24.43,28.37 25.03,28.37 25.23,28.57 25.23,28.87 | 25.23,28.87 J4.B7 | D3.1 25.51,27.29 25.33,27.47 25.33,29.09 J4.B7 25.26,28.87 25.23,28.87
DP
  Top 0.152: 24.73,29.87 24.73,30.37 24.53,30.57 23.83,30.57 23.74,30.48 J4.B6 23.74,28.08 23.61,27.95 D3.3 | 24.73,29.77 24.73,29.87 | J4.A6 24.74,29.85 24.73,29.87
EPD_3V3
  Top 0.3: 10.33,16.27 J1.15 J1.16 10.37,15.7 10.8,15.7 11.53,14.97 13.13,14.97 13.4,14.7 EPD_C5.2 13.98,14.69 13.98,14.67 | 13.98,14.67 14.43,14.67 15,14.1 L5.2 15,15.24 15.03,15.27 | 13.98,14.67 13.93,14.67 | 15.03,15.27 15.03,17.46 C1-EP-DR.1 14.97,18.31 15.05,18.31 15.94,19.2 15.94,22.38 Q1.3 | 15.03,15.27 15.03,14.17
EPD_BUSY  (via drill 0.15)
  Top 0.152: U1.P$AD12 34.12,14.12 34.33,14.33 v34.33,14.37 | J1.9 9.85,19.24 v9.53,19.57
  Route2 0.152: v34.33,14.37 34.53,14.57 34.53,17.77 33.83,18.47 14.03,18.47 11.63,20.87 8.93,20.87 v8.83,20.77
  Route15 0.152: v8.83,20.77 9.53,20.07 v9.53,19.57
EPD_CS  (via drill 0.15)
  Top 0.152: U1.P$K2 30.02,11.47 v29.93,11.47 | J1.12 9.3,17.74 v9.23,17.67
  Route15 0.152: v29.93,11.47 29.33,10.87 9.63,10.87 8.6,11.9 8.6,17.04 v9.23,17.67
EPD_DC  (via drill 0.15)
  Top 0.152: U1.P$AD10 34.18,13.37 v34.33,13.37 | J1.11 9.35,18.24 v9.23,18.37
  Route15 0.152: v34.33,13.37 34.33,12.27 31.93,9.87 10.03,9.87 8.23,11.67 8.23,17.37 v9.23,18.37
EPD_RST  (via drill 0.15)
  Top 0.152: v33.68,13.62 U1.P$AC11 33.41,13.86 U1.P$AC11 | J1.10 9.55,18.74 v9.43,18.87
  Route2 0.152: v33.68,13.62 33.33,13.97 33.13,14.17 33.13,16.67 32.93,16.87 32.43,16.87 32.13,17.17 32.13,17.67 32.23,17.77 32.23,17.97 32.13,18.07 13.93,18.07 11.53,20.47 9.13,20.47 8.93,20.27 8.93,19.37 v9.43,18.87
  Route15 0.152: v33.68,13.62 33.92,13.87 34.93,13.87 35.43,13.37 36.93,13.37 37.33,13.77 37.33,14.07
GDR  (via drill 0.15)
  Top 0.152: J1.2 13.25,22.74 v13.63,22.37 | v16.43,20.47 16.43,19.88 Q3.1 16.83,19.47 | R2_EP_DR.2 17.38,20.02 16.83,19.47 | 16.83,19.47 16.73,19.57 16.68,19.52
  Route15 0.152: v13.63,22.37 14.53,22.37 v16.43,20.47
GND  (via drill 0.15)  (95 unrouted)
  Top 0.152: IC9.B1 32.08,29.92 32.13,29.97 32.13,30.77 | IC9.C3 v32.13,31.57
  Top 0.3: C33.2 35,33.1 v34.93,33.17 | IC2.B3 36.43,6.5 v36.43,5.87 | IC2.B1 36.4,7.8 v36.13,8.07 | 42.02,15.99 J2.5 41.73,15.67 41.73,15.57 41.73,15.47 41.73,15.05 41.72,15.03 J2.3 | 42.02,15.99 42.1,16.07 v42.23,16.07 | U3.6 27.92,4.71 27.92,3.95 27.77,3.8 U3.9 | U1.P$B7 28,12.87 28.61,12.87 28.84,12.64 U1.P$74 28.91,16.22 | 28.91,16.22 29.14,16.45 29.14,17.06 U1.P$F23 | 28.91,16.22 U1.P$78 | J4.A1_B12 27.7,29.25 28.3,29.25 28.76,29.71 J4.SH3 | v31.89,32.45 31.89,34.58 31.96,34.58 31.96,32.45 31.89,32.37 31.81,32.37 31.81,34.66 32.04,34.66 32.04,32.45 31.73,32.14 31.35,32.14 31.35,31.76 31.96,31.15 32.04,31.15 32.04,31.61 32.11,31.61 v32.13,31.57 | v13.83,21.32 13.29,21.32 EPD_C2.1 | 42.02,15.99 41.79,16.22 41.64,16.22 41.49,16.37 41.49,16.45 41.41,16.45 41.41,16.37 41.49,16.3 41.56,16.37 41.64,16.3 41.56,16.22 41.49,16.22 41.41,16.3 41.18,16.07 41.18,14.24 41.11,14.16 41.11,14.01 41.18,14.01 41.18,14.16 41.26,14.16 41.26,14.01 41.33,13.93 41.33,13.78 41.41,13.78 41.41,13.86 41.94,13.86 42.02,13.78 42.1,13.86 42.17,13.78 42.17,13.7 42.25,13.7 42.25,14.01 42.33,14.08 42.33,14.31 42.25,14.31 42.25,14.08 v42.33,14.01 | v36.84,16.83 36.38,16.83 C7.2 | v30.97,8.9 30.97,9.21 29.98,10.2 29.98,10.27 C5.2 | v26.17,17.44 25.94,17.44 25.71,17.67 25.71,18.05 C11.2 | v25.18,15.08 25.41,15.08 25.64,15.3 C13.2
  Route2 0.3: U1.P$78 28.84,16.22 28.84,16.68 28.08,17.44 v26.17,17.44 26.09,17.36 26.09,15.99 v25.18,15.08
  Bottom 0.3: v31.89,32.45 31.35,32.98 29.75,32.98 29.6,33.13 29.52,33.06 29.45,33.06 29.37,32.98 29.3,32.98 29.22,32.91 29.22,32.75 29.07,32.75 28.99,32.83 28.91,32.75 28.69,32.75 28.61,32.83 28.53,32.75 28.46,32.83 28.46,32.98 28.38,33.06 28.23,32.91 28.23,32.83 28.46,32.6 28.46,31.08 28.38,31 28.38,30.92 28.3,30.85 28.3,30.77 28.23,30.7 28.15,30.7 28.08,30.62 28,30.62 28,30.7 28.15,30.85 28.15,30.92 28.23,31 28.3,31 28.38,31.08 28.46,31 28.53,31.08 28.61,31 28.69,31.08 28.76,31.08 28.76,31 29.07,31 29.14,30.92 29.22,30.92 29.3,30.85 29.45,30.85 29.52,30.77 29.45,30.7 29.45,28.94 29.37,28.87 29.45,28.79 29.37,28.71 29.37,28.56 29.3,28.49 28.61,28.49 28.53,28.41 28.46,28.41 28.38,28.49 28.38,28.56 28.3,28.64 28.3,28.71 28.23,28.79 21.07,28.79 20.91,28.94 20.84,28.94 20.76,28.87 20.76,28.79 20.61,28.64 20.53,28.64 20.53,28.41 20.46,28.41 20.38,28.49 19.92,28.49 19.85,28.56 19.77,28.56 19.69,28.64 19.62,28.64 19.62,28.71 19.54,28.79 19.46,28.79 19.46,28.71 19.69,28.49 19.85,28.49 19.85,27.34 v13.83,21.32 | v42.33,14.01 42.33,14.31 40.88,15.76 40.88,17.28 40.34,17.82 39.12,17.82 38.13,16.83 v36.84,16.83 | v30.97,8.9 32.65,7.23 33.41,7.23 34.7,8.52 35.77,8.52 36.15,8.14 v36.13,8.07
  pour Top: 42.38,20.56 46.03,20.56 46.03,34.02 42.38,34.02
  pour Top: -2.07,-1.39 35.87,-2.65 35.87,35.29 -2.07,35.29
  pour Top: 36.03,-0.11 46.03,-0.11 46.03,24.4 36.03,24.4
  pour Top: 36.03,34.18 49.15,34.18 36.03,36.8
  pour Bottom: 42.38,20.56 46.03,20.56 46.03,34.02 42.38,34.02
  pour Bottom: -2.07,-0.11 35.87,-0.11 35.87,35.29 -2.07,35.29
  pour Bottom: 36.03,-0.11 46.03,-0.11 46.03,24.4 36.03,24.4
  pour Bottom: 36.03,34.18 42.22,34.18 42.22,35.29 36.03,35.29
  pour Route2: -2.07,-0.11 35.87,-0.11 35.87,35.29 -2.07,35.29
  pour Route2: 36.03,-0.11 46.03,-0.11 46.03,24.4 36.03,24.4
  pour Route2: 42.38,20.56 46.03,20.56 46.03,34.02 42.38,34.02
  pour Route2: 36.03,34.18 42.22,34.18 42.22,35.29 36.03,35.29
HAPTIC_EN  (via drill 0.15)
  Top 0.152: U1.P$U1 31.92,11.09 v31.91,11.07 | IC2.A1 36.9,8 v36.63,8.27
  Bottom 0.152: v31.91,11.07 33.61,9.37 35.53,9.37 v36.63,8.27
IMU_INT1
  Top 0.152: U1.P$N1 31.83,10.22 31.83,8.44 IC3.5
IMU_INT2  (via drill 0.15)
  Top 0.152: U1.P$P2 31.27,11.62 v31.43,11.47 | v31.35,7.84 31.35,8.37 IC3.6
  Bottom 0.152: v31.35,7.84 29.91,9.28 29.91,10.58 30.21,10.88 31.05,10.88 31.43,11.27 31.43,11.34 31.35,11.42 31.43,11.49 v31.43,11.47
LX1
  Top 0.152: IC9.B2 IC9.B3 31.73,30.77 31.73,30.8 31.67,30.86 30.93,31.6 30.93,33.37 30.89,33.44 30.89,33.52 L7.1
LX2
  Top 0.152: IC9.D2 IC9.D3 32.53,31.37 33.03,31.87 33.03,33.47 33.03,33.52 L7.2
MOSI  (via drill 0.15)
  Top 0.152: U1.P$B13 v27.83,14.47 | 10.03,16.77 9.83,16.77 9.69,16.63 v9.69,16.58 | 10.03,16.77 10.33,16.77 | J1.14 10.05,16.74 10.03,16.77
  Route15 0.152: v9.69,16.58 10.39,16.58 12.5,14.47 v27.83,14.47
N$1
  Top 0.152: IC1.D1 28.15,20.87 29.07,20.87 R9.2
N$2
  Top 0.152: IC9.D1 32.5,29.86 32.5,28.41 32.27,28.18 R4.2
N$3
  Top 0.152: IC9.E1 32.95,29.86 32.95,29.33 33.49,28.79 33.49,28.18 R2.2
N$4
  Top 0.152: R3.2 32.69,6.11 32.43,6.37 32.43,6.67 32.43,6.84 | 32.43,6.84 32.43,6.87 | IC3.1 32.43,6.84
N$5  (1 unrouted)
N$6
  Top 0.152: U1.P$B3 27.02,11.88 26.53,12.37 26.53,13.27 26.43,13.37 25.93,13.37 25.87,13.4 L2.1
N$7
  Top 0.152: L2.2 24.59,12.41 24.53,12.47 24.49,12.48 L3.1 24.55,12.37
N$8
  Top 0.152: U1.P$A23 27.32,17.02 24.98,17.02 24.63,17.37 23.86,17.37 X1.3 24.28,17.97 24.83,17.97 24.83,18.6 24.73,18.7 24.73,19.78 24.53,19.97 23.13,19.97 22.93,20.17 22.93,20.27 23.03,20.37 24.93,20.37 25.63,19.67 27.13,19.67 | C2.1 27.69,18.99 27.69,19.16 27.55,19.29 27.51,19.29 27.13,19.67 | 27.13,19.67
N$9
  Top 0.152: U1.P$A18 27.39,15.61 26.48,15.61 26.25,15.38 C13.1
N$10
  Top 0.152: U1.P$B24 27.92,18.06 28.4,18.53 28.4,19.14 29.33,20.07 30.08,20.07 C1.1
N$12
  Top 0.152: 39.03,28.87 ANT1.1 39.03,26.98 C22.1 34.55,23.69 34.32,23.46 C4.1 L1.2
N$13  (via drill 0.15)
  Top 0.152: U1.P$H23 30.69,17.12 v30.73,17.17 | v31.23,21.97 31.63,22.37 31.63,22.67 31.66,22.69 C3.1 31.94,22.37 32.53,22.37 | 32.53,22.37 32.83,22.37 | L1.1 32.61,22.45 32.53,22.37
  Bottom 0.152: v30.73,17.17 30.93,17.37 30.93,21.67 v31.23,21.97
N$14
  Top 0.152: U1.P$N24 30.97,17.67 30.97,17.97 31.58,18.58 C9.1
N$15
  Top 0.152: C32.2 38.13,6.69 38.13,6.46 38.06,6.39 38.13,6.31 38.06,6.24 37.83,6.24 37.6,6.46 37.6,6.62 37.22,7 36.99,7 36.91,7.07 IC2.A2
N$16
  Top 0.152: 18.32,8.9 16.34,8.9 15.96,9.28 D5.2 | 18.32,8.9 18.93,8.9 C2-EP-DR.2 | Q3.3 19.01,18.73 19.01,14.24 19.54,13.7 L5.1 19.54,13.63 18.32,12.41 18.32,8.9
N$17
  Top 0.152: C2-EP-DR.1 19.01,9.82 21.37,9.82 21.67,9.51 D2.1 21.45,9.82 21.98,10.35 21.98,11.95 D4.2
N$18
  Top 0.152: 14.57,23.69 R1_EP_DR.1 14.77,22.16 14.84,22.16 14.89,22.16 14.88,22.12 15.03,21.97 15.41,21.97 R_TYPE_SEL.2 | 14.57,23.69 14.57,23.72 14.53,23.77 | 14.57,23.69 14.59,23.69 SJ1.2
N$20
  Top 0.152: J1.4 10.4,21.7 10.7,21.7 11.24,21.17 12.07,21.17 EPD_C2.2
N$21
  Top 0.152: J1.5 10.4,21.17 10.78,21.17 11.92,20.03 12.15,20.03 EPD_C1.2
N$22  (via drill 0.15)
  Top 0.152: v9.64,15.23 9.64,15.08 9.94,14.77 10.32,14.77 J1.18 | v11.01,16.6 11.01,16.9 12.45,18.35 EPD_C6.2
  Bottom 0.152: v11.01,16.6 v9.64,15.23
N$23  (via drill 0.15)
  Top 0.152: v11.01,14.77 11.01,14.54 10.78,14.31 10.4,14.31 J1.19 | v11.77,15.84 12.38,15.84 12.45,15.91 EPD_C7.2
  Bottom 0.152: v11.01,14.77 11.01,15.08 v11.77,15.84
N$24
  Top 0.152: J1.20 10.4,13.78 12.15,13.78 12.45,14.08 EPD_C8.2
N$25
  Top 0.152: R1_USB.2 26.02,28.18 26.02,28.33 25.79,28.56 25.79,29.17 J4.A5
N$26  (via drill 0.15)
  Top 0.152: v9.64,12.41 9.94,12.71 10.32,12.71 J1.22 | v11.62,10.43 11.84,10.43 12.45,9.82 EPD_C10.2
  Bottom 0.152: v11.62,10.43 v9.64,12.41
N$27
  Top 0.152: R2_USB.1 22.82,28.26 22.82,29.17 J4.B5
N$28
  Top 0.152: EPD_C12.2 8.8,8.9 8.8,10.2 10.32,11.72 J1.24
OUT+  (via drill 0.15)
  Top 0.152: IC2.A3 37.13,6.3 v37.13,5.57 | TP_OP.TP 5.01,2.55 v5.63,3.17
  Route15 0.152: v37.13,5.57 36.93,5.37 29.23,5.37 28.03,6.57 9.03,6.57 v5.63,3.17
OUT-  (via drill 0.15)
  Top 0.152: IC2.C3 35.33,5.96 v35.33,5.77 | TP_ON.TP 2.84,6.17 v3.23,6.17
  Route15 0.152: v3.23,6.17 4.13,7.07 28.13,7.07 29.43,5.77 v35.33,5.77
P0.00/XL1  (via drill 0.15)
  Top 0.152: U1.P$D2 28.28,11.62 v28.23,11.57 | X2.1 24.92,8.67 v24.63,8.97 | C17.2 25.54,8.06 | 25.54,8.06 25.54,8.48 25.63,8.57 | X2.1 25.62,8.16 25.53,8.07 | 25.54,8.06 25.56,8.06 X2.1
  Bottom 0.152: v28.23,11.57 26.83,11.57 24.63,9.37 v24.63,8.97
P0.01/XL2  (via drill 0.15)
  Top 0.152: U1.P$F2 29.17,11.52 v29.03,11.37 | v29.13,8.57 29.13,8.37 29.03,8.27 28.83,8.27 28.43,8.67 28.15,8.67 | 28.15,8.67 X2.2 | C18.2 27.63,8.27 28.05,8.69 | 28.05,8.69 28.13,8.77 | 28.05,8.69 28.08,8.67 X2.2 28.15,8.67
  Bottom 0.152: v29.03,11.37 29.03,8.67 v29.13,8.57
P0.13  (via drill 0.15)
  Top 0.152: SW_UP.2 32.61,3.87 32.13,3.87 31.97,3.7 C30.2 31.41,3.67 30.93,3.67 30.92,3.68 R5.1 30.51,3.64 29.98,4.18 v29.98,4.41 | U1.P$AD8 33.99,13.12 34.15,12.97 34.56,12.97 34.58,12.98 v34.83,12.98
  Route15 0.152: v29.98,4.41 30.06,4.33 36.53,4.33 37.6,5.4 37.6,7.91 35.03,10.48 35.03,12.78 v34.83,12.98
P0.14  (via drill 0.15)
  Top 0.152: v33.5,12.88 33.5,13 33.43,13.07 U1.P$AC9 | v21.83,4.87 21.55,4.59 SW_ENT.2 21.29,3.67 20.73,3.67 20.69,3.71 C31.2 20.09,3.67 19.73,3.67 19.66,3.6 R8.1
  Route2 0.152: v33.5,12.88 34.3,12.08 36.76,12.08 37.96,13.28 44.21,13.28 45.03,12.46 45.03,11.87 v45.13,11.77
  Route15 0.152: v45.13,11.77 45.13,5.67 40.43,0.97 37.23,0.97 37.14,1.06 37.14,3.09 36.25,3.97 22.73,3.97 v21.83,4.87
P1.01  (1 unrouted)
  Top 0.152: P_PWR_EPD.1 20.07,23 19.62,23 19.01,22.39 Q1.1
P1.02  (via drill 0.15)
  Top 0.152: R7.1 9.18,3.11 9.48,3.42 9.48,3.72 C29.2 9.56,3.72 10.32,3.72 10.55,3.95 SW_DN.2 10.63,3.95 11.39,3.19 v12.84,3.19 | v33.33,19.42 32.5,18.58 32.5,17.67 U1.P$W24
  Bottom 0.152: v33.33,19.42 33.33,18.96 31.2,16.83 30.97,16.83 30.74,16.6 30.59,16.6 30.29,16.9 30.21,16.83 28.61,16.83 28.23,16.45 28.23,16.37 27.39,15.53 26.7,15.53 26.09,14.92 26.09,11.49 23.73,9.13 23.73,8.52 18.78,3.57 13.22,3.57 v12.84,3.19
PMIC_INT  (via drill 0.15)
  Top 0.152: U1.P$T2 32.08,11.62 | 32.08,11.62 v32.13,11.57 | IC1.A1 26.19,20.08 v26.13,20.08 | 32.08,11.62 32.11,11.65 v32.12,11.58
  Route2 0.152: v32.12,11.58 32.25,11.58 32.53,11.87 32.93,11.87 34.43,10.37 44.43,10.37 45.53,11.47 45.53,18.47 45.03,18.97 27.24,18.97 v26.13,20.08
PREVGH
  Top 0.3: J1.21 10.37,13.2 10.8,13.2 12.13,11.87 12.45,11.87 | 12.45,11.87 12.53,11.87 | 15.83,5.57 16.03,5.57 16.03,5.77 15.93,5.77 | D5.1 15.95,5.69 15.83,5.57 | 15.83,5.57 14.33,7.07 14.33,10.28 12.65,11.96 EPD_C9.2 12.45,11.88 12.45,11.87
PREVGL
  Top 0.3: J1.23 10.37,12.2 10.8,12.2 11.13,11.87 11.13,8.98 | 11.13,8.98 EPD_C11.2 | D2.2 21.63,5.97 21.53,5.97 19.03,5.97 17.43,4.37 14.83,4.37 11.12,8.08 EPD_C11.2 11.16,8.98 11.13,8.98
RESE  (via drill 0.15)
  Top 0.152: J1.3 10.45,22.12 10.77,22.12 11.09,21.8 R1_EP_DR.2 14.57,20.33 v15.13,19.77 | Q3.2 16.86,17.91 16.23,17.27 v16.13,17.27
  Route15 0.152: v15.13,19.77 15.13,18.27 v16.13,17.27
RESET  (via drill 0.15)  (1 unrouted)
  Top 0.152: v41.64,17.74 41.03,17.13 41.03,16.52 40.5,15.99 40.5,15.76 J2.6 | v21.6,23 18.48,26.12 12.38,26.12 8.42,22.16 8.42,10.66 7.96,10.2 3.54,10.2 2.7,9.36 2.7,8.67 2.78,8.6 2.78,8.52 2.85,8.45 2.85,8.29 3.69,7.45 3.69,3.87 3.01,3.19 TP_RESET.TP | U1.P$AC13 33.53,14.27 v33.63,14.27
  Route15 0.152: v41.64,17.74 41.49,17.74 39.89,19.34 34.48,19.34 30.82,23 v21.6,23
SCK  (via drill 0.15)
  Top 0.152: U1.P$A12 27.09,14.12 v26.93,13.97 | J1.13 9.5,17.24 v9.33,17.07
  Route15 0.152: v26.93,13.97 11.73,13.97 11.53,14.17 11.53,14.97 10.43,16.07 9.43,16.07 9.13,16.37 9.13,16.87 v9.33,17.07
SCL  (via drill 0.15)
  Top 0.152: v30.83,11.47 U1.P$M2 30.52,11.47 v30.43,11.47 | v33.73,8.57 33.83,8.47 34.26,8.47 R17.2 34.16,8.7 34.23,8.77 34.23,8.87 v34.13,8.97 | IC2.C1 35.9,7.7 v35.63,7.97 | v31.93,6.27 31.87,6.33 IC3.12 31.75,6.73 31.75,6.58 31.13,5.97 28.13,5.97 27.53,5.37 27.53,5.17 27.48,5.12 U3.7 27.34,4.92 27.34,5.23 27.13,5.45 v27.13,5.49 | TP_SCL.TP 6.93,1.86 v6.93,3.07 | IC1.B1 27.35,20.4 v27.03,20.08 | v31.35,28.64 31.58,28.41 31.58,28.18 R4.1
  Route2 0.152: v30.83,11.47 v33.73,8.57 33.73,7.57 32.43,6.27 v31.93,6.27 | v35.63,7.97 34.63,8.97 v34.13,8.97 | v30.43,11.47 30.43,11.27 29.93,10.77 28.13,10.77 26.53,12.37 26.53,14.14 26.53,14.77 | 26.53,14.77 26.53,14.87 | 26.53,14.77 26.73,14.97 v26.93,14.97
  Route15 0.152: v26.93,14.97 27.33,15.37 27.53,15.37 27.73,15.57 27.73,16.37 27.03,17.07 v27.03,20.08 | v27.13,5.49 8.95,5.49 6.93,3.47 v6.93,3.07
  Bottom 0.152: v31.35,28.64 31.43,28.56 31.43,27.42 26.7,22.69 26.7,20.56 26.93,20.33 26.93,20.26 27.09,20.1 v27.03,20.08
SDA  (via drill 0.15)
  Top 0.152: IC2.B2 36.63,6.8 v36.63,6.77 | R18.2 34.3,7.44 v34.13,7.27 | R18.2 33.36,7.24 32.83,7.37 32.42,7.37 | 32.42,7.37 32.33,7.37 | v30.53,10.37 30.53,11.02 U1.P$L1 31.03,10.52 v31.03,10.37 | U3.8 26.92,4.78 26.53,5.17 v26.53,5.89 | v33.19,7.7 33.27,7.7 33.4,7.84 R18.2 | v33.22,6.38 32.93,6.67 32.93,6.99 32.66,7.26 32.52,7.26 IC3.2 32.42,7.38 32.42,7.37 | IC1.C1 27.75,19.89 v27.63,19.77 | v32.95,28.71 32.95,28.18 R2.1 | v37.68,4.79 38.36,4.1 38.36,3.64 TP_SDA.TP
  Route2 0.152: v34.13,7.27 34.13,6.87 34.23,6.77 v36.63,6.77 | v33.22,6.38 33.14,6.38 32.63,5.87 27.32,5.87 27.3,5.89 v26.53,5.89 | v31.03,10.37 31.03,10.17 30.53,9.67 28.73,9.67 26.13,12.27 26.13,15.07 v27.93,16.87
  Route15 0.152: v27.93,16.87 27.63,17.17 v27.63,19.77
  Bottom 0.152: v30.53,10.37 30.73,10.17 30.73,9.77 32.8,7.7 v33.19,7.7 | v32.95,28.71 32.95,25.21 27.54,19.8 27.62,19.72 v27.63,19.77 | v37.68,4.79 37.68,5.32 37.75,5.4 37.75,5.78 36.69,6.85 v36.63,6.77
SWDCLK  (via drill 0.15)
  Top 0.152: J2.4 40.05,14.83 v40.05,15.07 | U1.P$AA24 37.17,21.87 39,21.87 | 39,21.87 39.03,21.87 | v39.34,16.38 39.03,16.69 39.03,20.37 39.08,20.42 TP_SWDCLK.TP 39,21.87
  Route2 0.152: v40.05,15.07 39.95,15.17 39.95,15.64 39.34,16.24 v39.34,16.38
SWDIO  (via drill 0.15)
  Top 0.152: v34.48,18.43 33.72,17.67 33.49,17.67 U1.P$AC24 | v39.81,12.79 40.12,13.09 40.42,13.09 J2.2 | v40.95,21.48 41.64,22.16 42.1,22.16 TP_SWDIO.TP
  Bottom 0.152: v34.48,18.43 34.4,18.35 34.4,17.97 36.11,16.26 | 36.11,16.26 36.31,16.07 36.31,14.24 37.07,13.47 39.2,13.47 39.81,12.87 v39.81,12.79 | v40.95,21.48 36.76,17.28 36.69,17.28 36.23,16.83 36.23,16.37 36.11,16.26
SWO  (via drill 0.15)
  Top 0.152: v38.59,17.97 36.99,16.37 34.93,16.37 34.7,16.6 33.94,16.6 U1.P$AD22 | v39.96,2.66 39.96,1.97 40.5,1.44 TP_SWO.TP
  Route15 0.152: v38.59,17.97 38.82,18.2 40.57,18.2 41.26,17.51 41.26,13.09 39.96,11.8 v39.96,2.66
VBAT  (via drill 0.15)
  Top 0.152: IC1.C2 27.75,21.49 v28.23,21.97 | U3.2 27.89,2.81 27.91,2.79 27.93,2.77
  Top 0.3: v28.63,22.27 29.23,22.27 29.73,22.77 C37.1 | C37.1 29.73,23.67 29.75,23.69 C37.1 | C37.1 30.45,24.37 v30.63,24.37 | v29.03,0.77 28.43,0.77 28.11,1.08 C27.2 28.11,1.98 27.98,2.12 | 27.98,2.12 U3.3 27.92,2.81 27.91,2.79 | v12.53,5.93 9.56,5.93 6.59,8.9 4.07,8.9 TP_VBAT.TP | v14.89,5.02 15.27,5.02 15.43,4.86 17.26,4.86 19.31,6.92 22.74,6.92 26.48,3.19 26.48,2.35 26.7,2.12 27.98,2.12
  Route15 0.3: v30.63,24.37 43.53,24.37 45.63,22.27 45.63,6.5 45.57,5.84 45.27,4.72 44.78,3.66 44.44,3.19 42.81,1.55 42.34,1.22 41.28,0.73 40.16,0.43 39.5,0.37 36.73,0.37 36.73,2.2 36.76,2.24 36.76,2.93 36.27,3.42 31.88,3.42 31.13,2.67 30.93,2.67 v29.03,0.77
  Bottom 0.152: v28.23,21.97 28.53,22.27 v28.63,22.27
  Bottom 0.3: v12.53,5.93 13.98,5.93 v14.89,5.02
VBUS  (via drill 0.15)
  Top 0.152: IC1.A2 26.63,21.56 26.63,21.77 26.53,21.87 26.13,21.87
  Top 0.3: C38.1 25.73,21.98 25.73,22.67 24.56,23.84 D3.5 24.57,24.45 24.53,24.37 24.53,23.07 23.93,22.47 22.63,22.47 22.09,23 J4.A9_B4 22.09,29.89 22.2,30 22.2,30.84 22.33,30.97 26.43,30.97 26.78,30.61 26.78,30 26.89,29.89 J4.A4_B9 27.09,28.98 27.09,28.47 28.33,27.24 28.33,26.77 28.35,26.75 C43.2 29.08,27.42 29.33,27.67 29.5,27.67 C42.2 | 26.32,21.87 26.13,21.87 25.69,21.87 C38.1 | U1.P$AD2 34.89,11.62 35.33,12.07 35.33,13.57 35.83,14.07 36,14.07 | 36,14.07 36.13,14.07 | v36.93,14.47 36.52,14.05 C21.1 36,14.08 36,14.07 | C38.1 25.66,20.94 v25.83,20.77
  Route15 0.3: v36.93,14.47 30.63,20.77 v25.83,20.77
VREG  (via drill 0.15)
  Top 0.152: IC1.B2 27.35,21.95 v27.33,21.97 | IC9.A3 IC9.A2 IC9.A1 31.33,29.27 v31.23,29.17
  Top 0.3: v27.33,22.47 27.33,24.11 C39.1 27.81,24.9 29.36,24.9 30.53,26.07 30.53,27.07 30.63,27.17 31.12,27.17 C23.2 | C23.2 31.95,27.19 31.97,27.21 C24.2 | C23.2 30.83,27.52 v30.83,28.77 | v42.25,3.8 42.63,3.42 TP_VREG.TP
  Route15 0.3: v42.25,3.8 40.57,2.12 39.81,2.12 39.43,2.5 39.43,4.25 39.58,4.41 39.58,9.89 39.12,10.35 37.98,10.35 37.07,11.27 37.07,12.56 38.06,13.55 39.28,13.55 40.88,15.15 40.88,17.28 40.34,17.82 39.12,17.82 38.74,17.44 34.63,17.44 30.59,21.48 27.85,21.48 27.39,21.93 v27.33,21.97
  Bottom 0.152: v27.33,21.97 v27.33,22.47 | v31.23,29.17 v30.83,28.77